# Altium PCB CSGB.PcbDoc
Units mm, origin at the board's own origin, x right, y up, seen from the top; angles counter-clockwise.
Board outline 28 x 30 mm, 2 copper layers (Top Layer, Bottom Layer), stack 1.569 mm thick; 14 components, 10 nets, 35 pads, 191 vias.
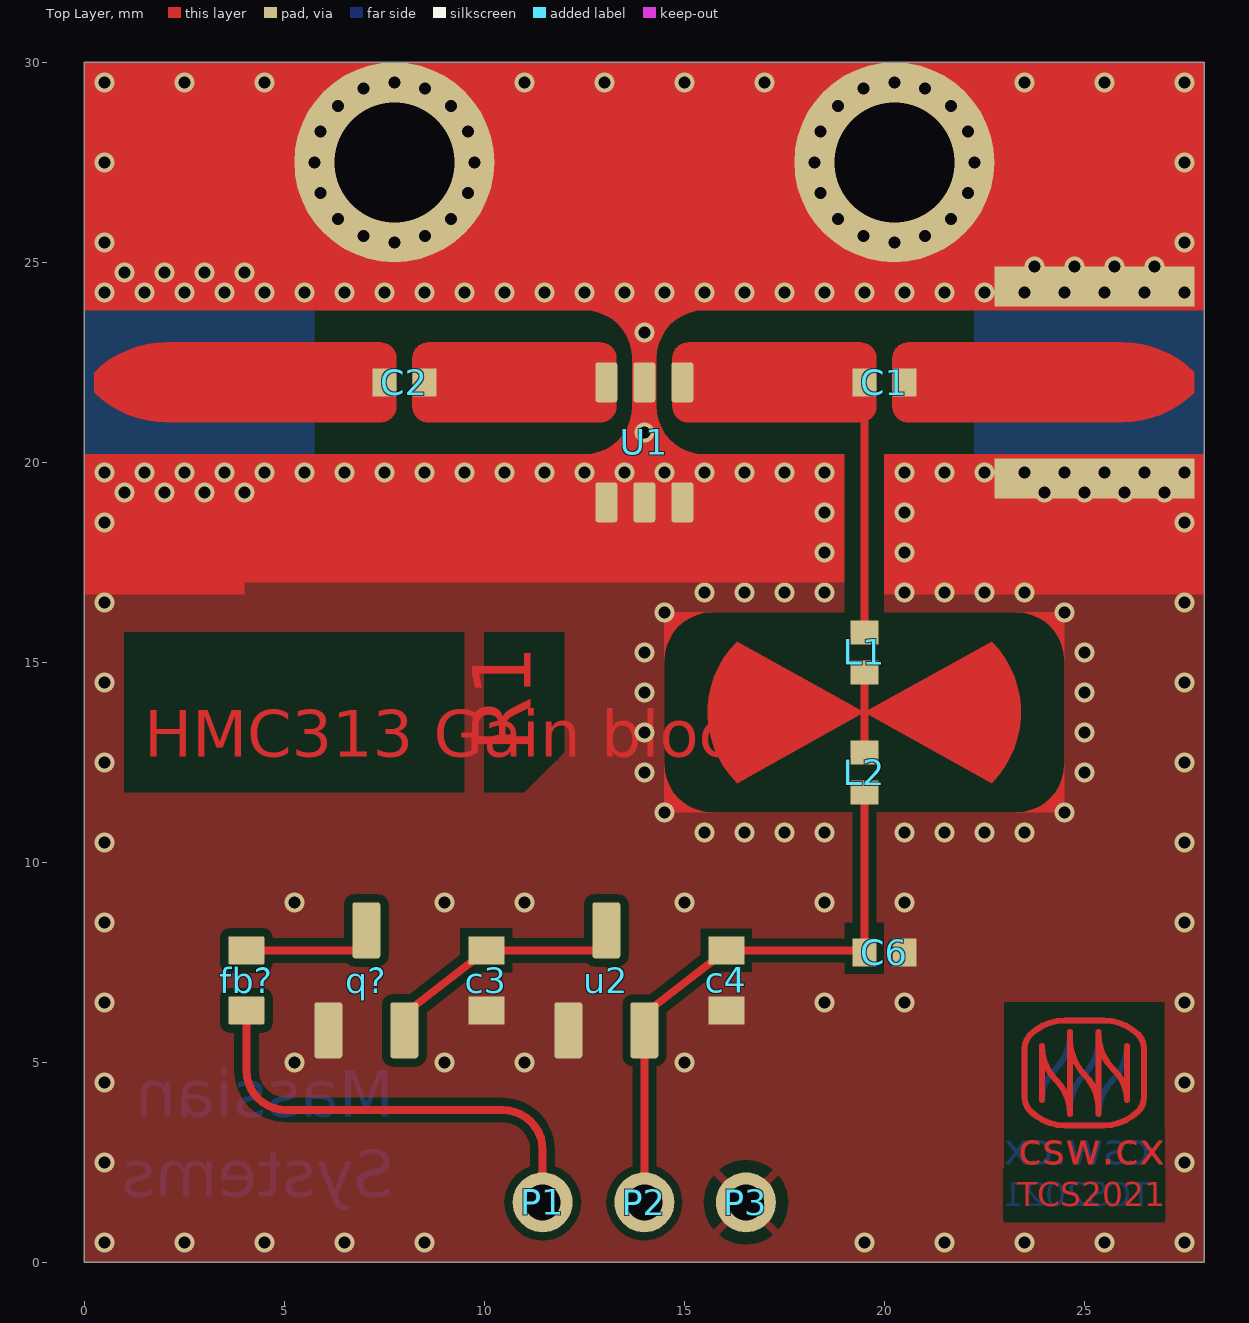
[diagram p0: Top Layer view]
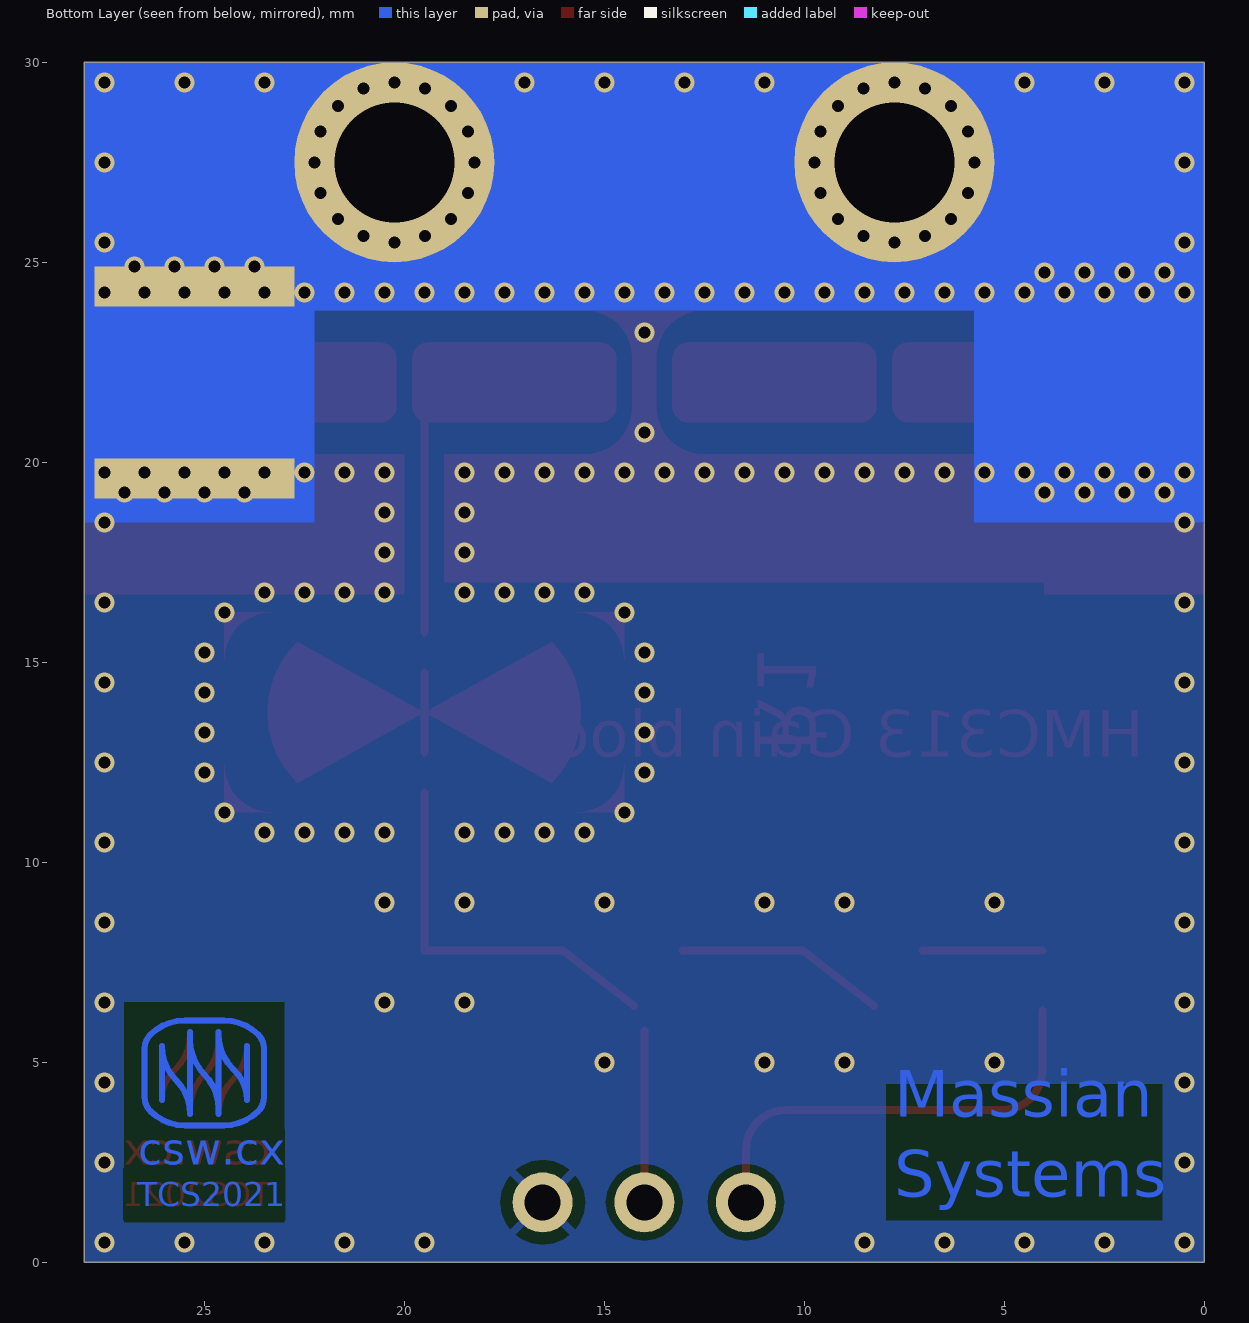
[diagram p1: Bottom Layer view, seen from below]

## Layer stack, top to bottom
Top Solder: solder mask 0.0254, SM-001, Dk 4
Top Layer: signal copper 0.035
Dielectric 1: core 1.4986, Core-043, Dk 4.3
Bottom Layer: signal copper 0.035
Bottom Solder: solder mask 0.0254, SM-001, Dk 4

## Board outline
0,30 28,30 28,0 0,0

## Design rules (kind name [scope] priority, off if disabled: settings)
Clearance [All] p1: gap=0.2 ignorepadtopadclearanceinfootprint=FALSE except(0: Arc-Hole Track-Hole SMDPad-Hole THPad-Hole Via-Hole Fill-Hole Poly-Hole Region-Hole Text-Hole; 0.1: Arc-Arc Arc-Track Arc-SMDPad Track-Track Track-SMDPad; 0.15: SMDPad-SMDPad; 0.3: Via-Via; 0.5: THPad-THPad)
ComponentClearance [All] p1: gap=0 collisioncheckmode=3 verticalgap=0 showdistances=FALSE
DiffPairsRouting [All] p1: maxlimit=3 minlimit=0.2 mostfreqgap=0.2 toplayer_minwidth=0.15 toplayer_maxwidth=1 toplayer_prefwidth=0.2 bottomlayer_minwidth=0.15 bottomlayer_maxwidth=1 bottomlayer_prefwidth=0.2 maxuncoupledlength=20
HoleSize [All] p1: absolutevalues=TRUE maxlimit=6.3 minlimit=0.2 maxpercent=80.000 minpercent=20.000
HoleToHoleClearance [All] p1: gap=0.2 allowstackedmicrovias=TRUE
MinimumAnnularRing [All] p1: minimumring=0.13
MinimumSolderMaskSliver [All] p1: minsoldermaskwidth=0.2
NetAntennae [All] p1 off: netantennaetolerance=0
PlaneClearance [All] p1: clearance=0.5
PlaneConnect [All] p1: planeconnectstyle=Relief reliefexpansion=0.5 reliefentries=4 reliefconductorwidth=0.2 reliefairgap=0.3
PolygonConnect [All] p1: thpad.connectstyle=Relief thpad.reliefconductorwidth=0.2 thpad.reliefentries=4 thpad.polygonreliefangle="45 Angle" thpad.airgapwidth=0.3 smdpad.connectstyle=Direct smdpad.reliefconductorwidth=0.2 smdpad.reliefentries=4 smdpad.polygonreliefangle="45 Angle" smdpad.airgapwidth=0.3 via.connectstyle=Direct via.reliefconductorwidth=0.2 via.reliefentries=4 via.polygonreliefangle="45 Angle" via.airgapwidth=0.3
RoutingCorners [All] p1: cornerstyle=45-Degree minsetback=2.5 maxsetback=2.5
RoutingVias [All] p1: holewidth=0.3 width=0.5 viastyle="Through Hole" minholewidth=0.2 minwidth=0.45 maxholewidth=6.3 maxwidth=10
SilkToSilkClearance [All] p1: silktosilkclearance=0
SilkToSolderMaskClearance [IsPad] p1: minsilkscreentomaskgap=0.2 clearancetoexposedcopper=TRUE
SolderMaskExpansion [All] p1: expansion=0.1 istentingtop=FALSE
UnRoutedNet [All] p1: checkbadconnections=TRUE
Width [All] p1: maxlimit=50 minlimit=0.127 preferedwidth=0.2 minimp=50.000000 maximp=50.000000 favimp=50.000000
18 further rules are at their usual default settings.

## Components (designator, comment, footprint, x,y, rotation, side; value= is the part's Value field where it differs from the comment)
C1 "100pF" CS-0402! 20,22 r180 top
C2 "100pF" CS-0402! 8,22 r180 top
c3 "10uF" CS-0603 10.05,7.05 r90 top
c4 "10uF" CS-0603 16.05,7.05 r90 top
C6 "100pF" CS-0402! 20,7.75 r0 top
fb? "Ferrite" CS-0603Perfect 4.05,7.05 r90 top
L1 "0402-Generic" CS-0402! 19.5,15.25 r270 top
L2 "0402-Generic" CS-0402! 19.5,12.25 r270 top
P1 "CS-PH-1" CS-PH-1 11.46,1.5 r0 top
P2 "CS-PH-1" CS-PH-1 14,1.5 r0 top
P3 "CS-PH-1" CS-PH-1 16.54,1.5 r0 top
q? "NCE3407" SOT-23-3-Extended 7.05,7.05 r270 top
U1 "HMC313" SOT-23-6 14,20.5 r90 top
u2 "HX6306" SOT-23-3-Extended 13.05,7.05 r270 top

## Footprints (in the part's own frame and the unit in brackets; to place one, negate y for a bottom-side part, rotate by r counter-clockwise, add the part's x,y. Pads: shape width x height; smd on the part's side, far side on the other; paste and mask are expansions set on the pad)
CS-0402! [mm] "1005(0402) Medium/perfect density, cap varient for general purpose"
  rect 0.6x0.7 smd: 1(-0.5,0) 2(0.5,0)
  body extent -0.5,-0.25 0.5,0.25, height 0.4
CS-0603 [mm]
  rect 0.7x0.9 smd: 1(-0.75,0) 2(0.75,0)
CS-0603Perfect [mm]
  rrect10% 0.7x0.9 smd mask+0.1: 1(-0.75,0) 2(0.75,0)
CS-PH-1 [mm]
  round 1.5 hole 0.9: 1(0,0)
SOT-23-3-Extended [mm]
  rrect20% 1.4x0.7 smd: 1(1.25,-0.95) 2(1.25,0.95) 3(-1.25,0)
  body extent -0.69,-1.5 0.69,1.5, height 1
SOT-23-6 [mm]
  rrect25% 1x0.55 smd: 1(1.5,-0.95) 2(1.5,0) 3(1.5,0.95) 4(-1.5,0.95) 5(-1.5,0) 6(-1.5,-0.95)
  body extent -0.9,-1.45 0.9,1.45, height 1.15

## Part data
C1 C2 C6: library part C0402!
c3 c4: library part C0603
fb?: library part 0603-Generic
q?: "P-Ch En MOSFET", LCSC Part #=C113770
u2: "LDO"

## Free pads (board coordinates)
  round 5 hole 3 mask+0.102: 1(7.75,27.5) 1(20.25,27.5)
  rect 5x1 all layers, no hole: 2(25.25,19.6) 2(25.25,24.4)

## Via types
v1: diameter 0.5, hole 0.3, Top Layer to Bottom Layer, tented both sides, 159 vias
v2: diameter 0.5, hole 0.3, Top Layer to Bottom Layer, 32 vias

## Nets (pads, with @x,y where several pads share a name; then routed paths per layer and width w, separated by ;. In a path a pad name is that pad's centre, name@x,y a point inside that pad or via, vN(x,y) a via of type N, cw(c..) or ccw(c..) an arc to the next point about the centre after c; other vN are vias at no path point)
5v: c4.2 C6.1 L2.2 P2.1 u2.2 | length 13.9
  Top Layer w0.2: P2.1 u2.2 ; u2.2@14.252,6.409 c4.2 C6.1@19.5,7.8 ; C6.1@19.5,7.9 L2.2
gnd: c3.1 c4.1 C6.2 P3.1 pad.1 pad.2 q?.1 U1.2 U1.4 U1.5 U1.6 u2.1
  other v1: 0.5,0.5 2.5,0.5 4.5,0.5 6.5,0.5 8.5,0.5 19.5,0.5 21.5,0.5 23.5,0.5 25.5,0.5 27.5,0.5 0.5,2.5 27.5,2.5 0.5,4.5 27.5,4.5 5.25,5 9,5 11,5 15,5 0.5,6.5 18.5,6.5 20.5,6.5 27.5,6.5 0.5,8.5 27.5,8.5 5.25,9 9,9 11,9 15,9 18.5,9 20.5,9 0.5,10.5 27.5,10.5 15.5,10.75 16.5,10.75 17.5,10.75 18.5,10.75 20.5,10.75 21.5,10.75 22.5,10.75 23.5,10.75 14.5,11.25 24.5,11.25 14,12.25 25,12.25 0.5,12.5 27.5,12.5 14,13.25 25,13.25 14,14.25 25,14.25 0.5,14.5 27.5,14.5 14,15.25 25,15.25 14.5,16.25 24.5,16.25 0.5,16.5 27.5,16.5 15.5,16.75 16.5,16.75 17.5,16.75 18.5,16.75 20.5,16.75 21.5,16.75 22.5,16.75 23.5,16.75 18.5,17.75 20.5,17.75 0.5,18.5 27.5,18.5 18.5,18.75 20.5,18.75 1,19.25 2,19.25 3,19.25 4,19.25 24,19.25 25,19.25 26,19.25 27,19.25 0.5,19.75 1.5,19.75 2.5,19.75 3.5,19.75 4.5,19.75 5.5,19.75 6.5,19.75 7.5,19.75 8.5,19.75 9.5,19.75 10.5,19.75 11.5,19.75 12.5,19.75 13.5,19.75 14.5,19.75 15.5,19.75 16.5,19.75 17.5,19.75 18.5,19.75 20.5,19.75 21.5,19.75 22.5,19.75 23.5,19.75 24.5,19.75 25.5,19.75 26.5,19.75 27.5,19.75 14,20.75 14,23.25 0.5,24.25 1.5,24.25 2.5,24.25 3.5,24.25 4.5,24.25 5.5,24.25 6.5,24.25 7.5,24.25 8.5,24.25 9.5,24.25 10.5,24.25 11.5,24.25 12.5,24.25 13.5,24.25 14.5,24.25 15.5,24.25 16.5,24.25 17.5,24.25 18.5,24.25 19.5,24.25 20.5,24.25 21.5,24.25 22.5,24.25 23.5,24.25 24.5,24.25 25.5,24.25 26.5,24.25 27.5,24.25 1,24.75 2,24.75 3,24.75 4,24.75 23.75,24.9 24.75,24.9 25.75,24.9 26.75,24.9 0.5,25.5 27.5,25.5 0.5,27.5 27.5,27.5 0.5,29.5 2.5,29.5 4.5,29.5 11,29.5 13,29.5 15,29.5 17,29.5 23.5,29.5 25.5,29.5 27.5,29.5
  other v2: 7.75,25.5 20.25,25.5 6.985,25.652 8.515,25.652 19.485,25.652 21.015,25.652 6.336,26.086 9.164,26.086 18.836,26.086 21.664,26.086 5.902,26.735 9.598,26.735 18.402,26.735 22.098,26.735 5.75,27.5 9.75,27.5 18.25,27.5 22.25,27.5 5.902,28.265 9.598,28.265 18.402,28.265 22.098,28.265 6.336,28.914 9.164,28.914 18.836,28.914 21.664,28.914 6.985,29.348 8.515,29.348 19.485,29.348 21.015,29.348 7.75,29.5 20.25,29.5
NetC1_1: C1.1
NetC1_2: C1.2 L1.1 U1.1 | length 6.3
  Top Layer w0.2: L1.1 C1.2
NetC2_1: C2.1 U1.3
NetC2_2: C2.2
NetL1_2: L1.2 L2.1 | length 2
  Top Layer w0.2: L2.1 L1.2
vin: fb?.1 P1.1 | length 11.3
  Top Layer w0.2: fb?.1 4.05,4.806 ccw(c5.05,4.806) 5.05,3.806 ; 5.1,3.806 10.46,3.806 cw(c10.46,2.806) 11.46,2.806 P1.1
vp: c3.2 q?.2 u2.3 | length 5.3
  Top Layer w0.2: q?.2@8.252,6.409 c3.2 u2.3@13.05,7.8
wf: fb?.2 q?.3 | length 3
  Top Layer w0.2: fb?.2 q?.3@7.05,7.8
copper on no net: | length 45.8
  Top Layer w0.15: 23.936,4.062 23.936,5.409 ccw(c25.135,5.409) 24.287,4.562 24.294,4.555 cw(c23.447,3.707) 24.645,3.707 24.645,5.764 ; 25.355,3.707 25.355,5.764 ; 25.355,3.844 ccw(c24.144,3.844) 25,4.7 cw(c25.856,5.556) 24.645,5.556 ; 25.355,5.556 25.355,5.764 ; 26.064,5.409 26.064,4.062 ccw(c25.037,4.062) 25.763,4.788 25.709,4.842 cw(c26.565,5.698) 25.355,5.698 25.355,5.764 ; 24.645,5.556 24.645,5.764 ; 24.645,5.556 24.645,5.764 ; 23.51,4.115 ccw(c23.983,4.115) 23.649,3.781 ccw(c24.514,4.646) 24.514,3.423 24.645,3.423 25.486,3.423 ccw(c25.486,4.646) 26.351,3.781 ccw(c26.017,4.115) 26.49,4.115 26.49,4.771 26.49,5.356 ccw(c26.017,5.356) 26.351,5.689 ccw(c25.486,4.825) 25.486,6.048 24.645,6.048 24.514,6.048 ccw(c24.514,4.825) 23.649,5.689 ccw(c23.983,5.356) 23.51,5.356 23.51,4.7 23.51,4.115
  Bottom Layer w0.15: 23.936,5.409 23.936,4.062 cw(c24.963,4.062) 24.237,4.788 24.291,4.842 ccw(c23.435,5.698) 24.645,5.698 24.645,5.764 ; 24.645,3.707 24.645,5.764 ; 24.645,3.844 cw(c25.856,3.844) 25,4.7 ccw(c24.144,5.556) 25.355,5.556 ; 24.645,5.556 24.645,5.764 ; 26.064,4.062 26.064,5.409 cw(c24.865,5.409) 25.713,4.562 25.706,4.555 ccw(c26.553,3.707) 25.355,3.707 25.355,5.764 ; 25.355,5.556 25.355,5.764 ; 25.355,5.556 25.355,5.764 ; 23.51,4.115 ccw(c23.983,4.115) 23.649,3.781 ccw(c24.514,4.646) 24.514,3.423 25.355,3.423 25.486,3.423 ccw(c25.486,4.646) 26.351,3.781 ccw(c26.017,4.115) 26.49,4.115 26.49,4.7 26.49,5.356 ccw(c26.017,5.356) 26.351,5.689 ccw(c25.486,4.825) 25.486,6.048 25.355,6.048 24.514,6.048 ccw(c24.514,4.825) 23.649,5.689 ccw(c23.983,5.356) 23.51,5.356 23.51,4.771 23.51,4.115

## Polygon pours and split planes (outlines as drawn)
gnd on Top Layer "NONET_L-01_P-001" (solid, pour order 0): 0,17 28,17 28,0 0,0
gnd on Bottom Layer "NONET_L-01_P-001" (solid, pour order 3): 0,24.25 28,24.25 28,0 0,0

## Other copper
Top Layer:
  region net NetC2_2: 5.25,23 2.052,23 ccw(c2.052,20.46) 0.256,22.256 0.25,22.25 0.25,21.75 0.256,21.744 ccw(c2.052,23.54) 2.052,21 5.25,21
  region net NetC2_1: 8.2,22 8.2,21.4 ccw(c8.6,21.4) 8.6,21 9.8,21 9.8,22
  region net NetC2_1: 8.2,22 8.2,22.6 cw(c8.6,22.6) 8.6,23 9.8,23 9.8,22
  region net NetC2_1: 13.3,22 13.3,21.4 cw(c12.9,21.4) 12.9,21 9.8,21 9.8,22
  region net NetC2_1: 13.3,22 13.3,22.6 ccw(c12.9,22.6) 12.9,23 9.8,23 9.8,22
  region net NetC2_2: 7.8,22 7.8,22.6 ccw(c7.4,22.6) 7.4,23 5.25,23 5.25,22
  region net NetC2_2: 7.8,22 7.8,21.4 cw(c7.4,21.4) 7.4,21 5.25,21 5.25,22
  region net NetC1_1: 22.75,23 25.948,23 cw(c25.948,20.46) 27.744,22.256 27.75,22.25 27.75,21.75 27.744,21.744 cw(c25.948,23.54) 25.948,21 22.75,21
  region net NetC1_1: 20.2,22 20.2,21.4 ccw(c20.6,21.4) 20.6,21 22.75,21 22.75,22
  region net NetC1_1: 20.2,22 20.2,22.6 cw(c20.6,22.6) 20.6,23 22.75,23 22.75,22
  region net gnd: 23.3,16.25 cw(c23.3,15.05) 24.5,15.05 24.5,16.25
  region net gnd: 23.3,11.25 ccw(c23.3,12.45) 24.5,12.45 24.5,11.25
  region net gnd: 15.7,16.25 ccw(c15.7,15.05) 14.5,15.05 14.5,16.25
  region net gnd: 15.7,11.25 cw(c15.7,12.45) 14.5,12.45 14.5,11.25
  region net NetL1_2: 22.682,11.982 ccw(c20.914,13.75) 22.682,15.518 19.5,13.75
  region net NetL1_2: 16.318,15.518 ccw(c18.086,13.75) 16.318,11.982 19.5,13.75
  region net gnd: 15.5,20.2 cw(c15.5,21.4) 14.3,21.4 14.3,20.2
  region net gnd: 12.5,20.2 ccw(c12.5,21.4) 13.7,21.4 13.7,20.2
  region net gnd: 12.5,23.8 cw(c12.5,22.6) 13.7,22.6 13.7,23.8
  region net gnd: 15.5,23.8 ccw(c15.5,22.6) 14.3,22.6 14.3,23.8
  region net NetC1_2: 14.7,22 14.7,22.6 cw(c15.1,22.6) 15.1,23 18.2,23 18.2,22
  region net NetC1_2: 14.7,22 14.7,21.4 ccw(c15.1,21.4) 15.1,21 18.2,21 18.2,22
  region net NetC1_2: 19.8,22 19.8,22.6 ccw(c19.4,22.6) 19.4,23 18.2,23 18.2,22
  region net NetC1_2: 19.8,22 19.8,21.4 cw(c19.4,21.4) 19.4,21 18.2,21 18.2,22
  pour cut-out: 23,1 27,1 27,6.5 23,6.5
  pour cut-out: 19,8.5 19,7.9 20,7.9 20,8.5
  region: 22,16.5
  pour cut-out: 14.5,11.25 14.5,16.25 24.5,16.25 24.5,11.25
  region net gnd: 4,23.8 24,23.8 24,30 4,30
  pour cut-out: 10,15.75 12,15.75 12,12.75 11,11.75 10,11.75
  pour cut-out: 1,15.75 1,11.75 9.5,11.75 9.5,15.75
  pour cut-out: 19,8.5
  region net gnd: 14.3,22.5
  region net gnd: 13.7,23.8 13.7,20.2 14.3,20.2 14.3,23.8
  region net gnd: 4,20.2 4,17 19,17 19,20.2
  region net gnd: 28,20.2 20,20.2 20,16.7 28,16.7
  region net gnd: 28,23.8 24,23.8 24,30 28,30
  region net gnd: 0,23.8 4,23.8 4,30 0,30
  region net gnd: 0,20.2 4,20.2 4,16.7 0,16.7
  pour cut-out: 19,13.5 19,21 20,21 20,13.5
  region: 22,16.6
  text "R1" at 11.651,12.75 h2.5 r90
  text "HMC313 Gain block" at 1.5,12.25 h2
  text "csw.cx" at 23.345,2.433 h0.8
  text "TCS2021" at 23.326,1.4 h0.6
Bottom Layer:
  pour cut-out: 27,1 23,1 23,6.5 27,6.5
  region net gnd: 5.75,18.5 5.75,25.5 0,25.5 0,18.5
  region net gnd: 1.75,18.5 1.75,25.5 0,25.5 0,18.5
  region net gnd: 22.25,18.5 22.25,25.5 28,25.5 28,18.5
  region net gnd: 28,23.8 0,23.8 0,30 28,30
  text "csw.cx" at 26.655,2.433 h0.8
  text "TCS2021" at 26.674,1.4 h0.6
  text "Massian / Systems" at 7.75,1.25 h2

## Silkscreen, mask and mechanical layers (free items; w line width, h text height)
Top Solder:
  drawing of 98 lines, arcs and shapes, not listed
  text "V+" at 10,3 h1.5
  text "5V" at 13,3 h1.5
  text "GND" at 15,3 h1.5
Bottom Solder:
  drawing of 28 lines, arcs and shapes, not listed
Mechanical 1:
  the board outline again, w0.01